# Altium PCB McuComBrd.PcbDoc
Units mil, origin at the board's own origin, x right, y up, seen from the top; angles counter-clockwise.
Board outline 1900 x 1900 mil, 4 copper layers (Top Layer, GND, PWR, Bottom Layer), stack 23.756 mil thick; 59 components, 55 nets, 228 pads, 55 vias.
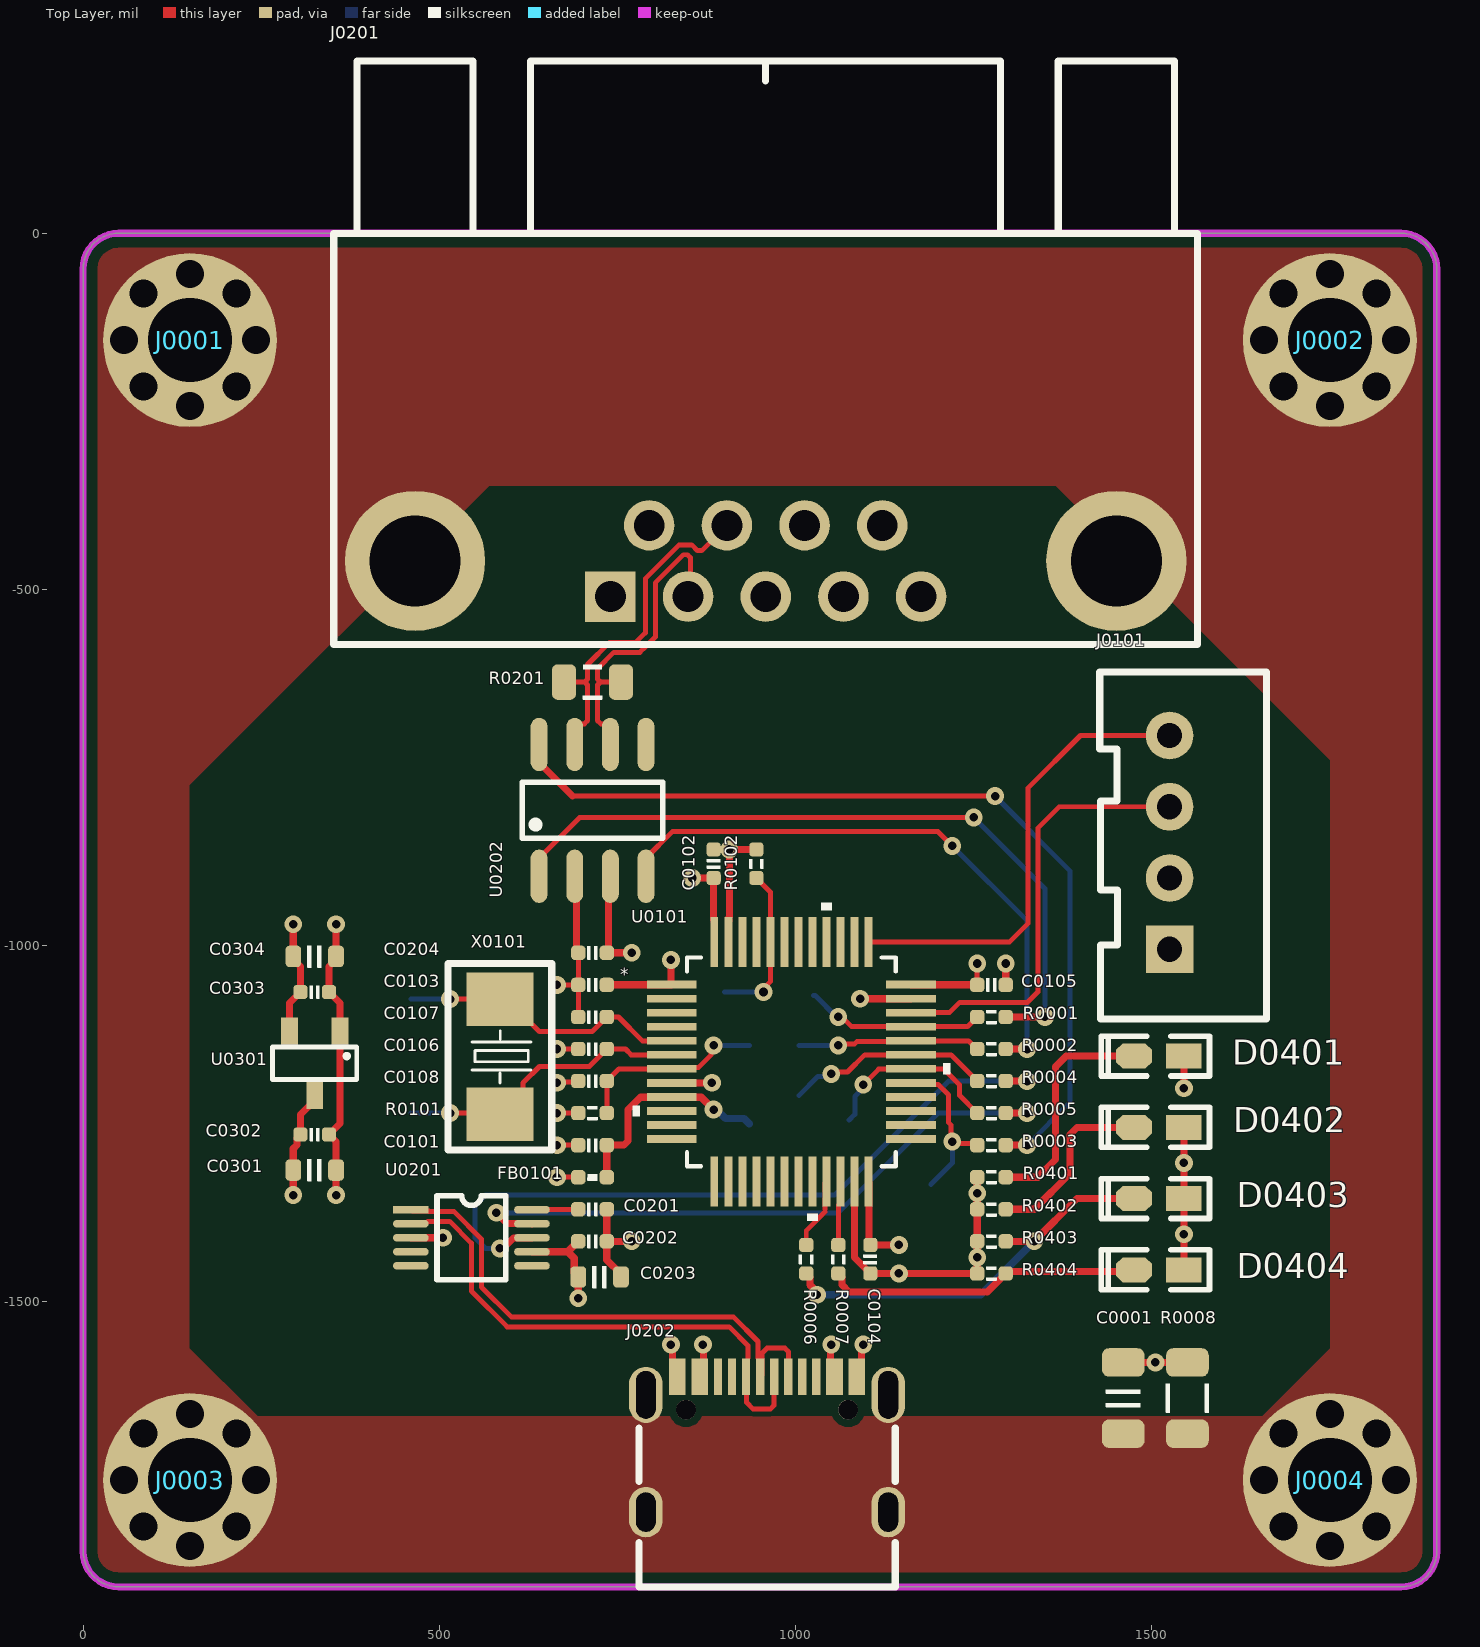
[diagram p0: Top Layer view]
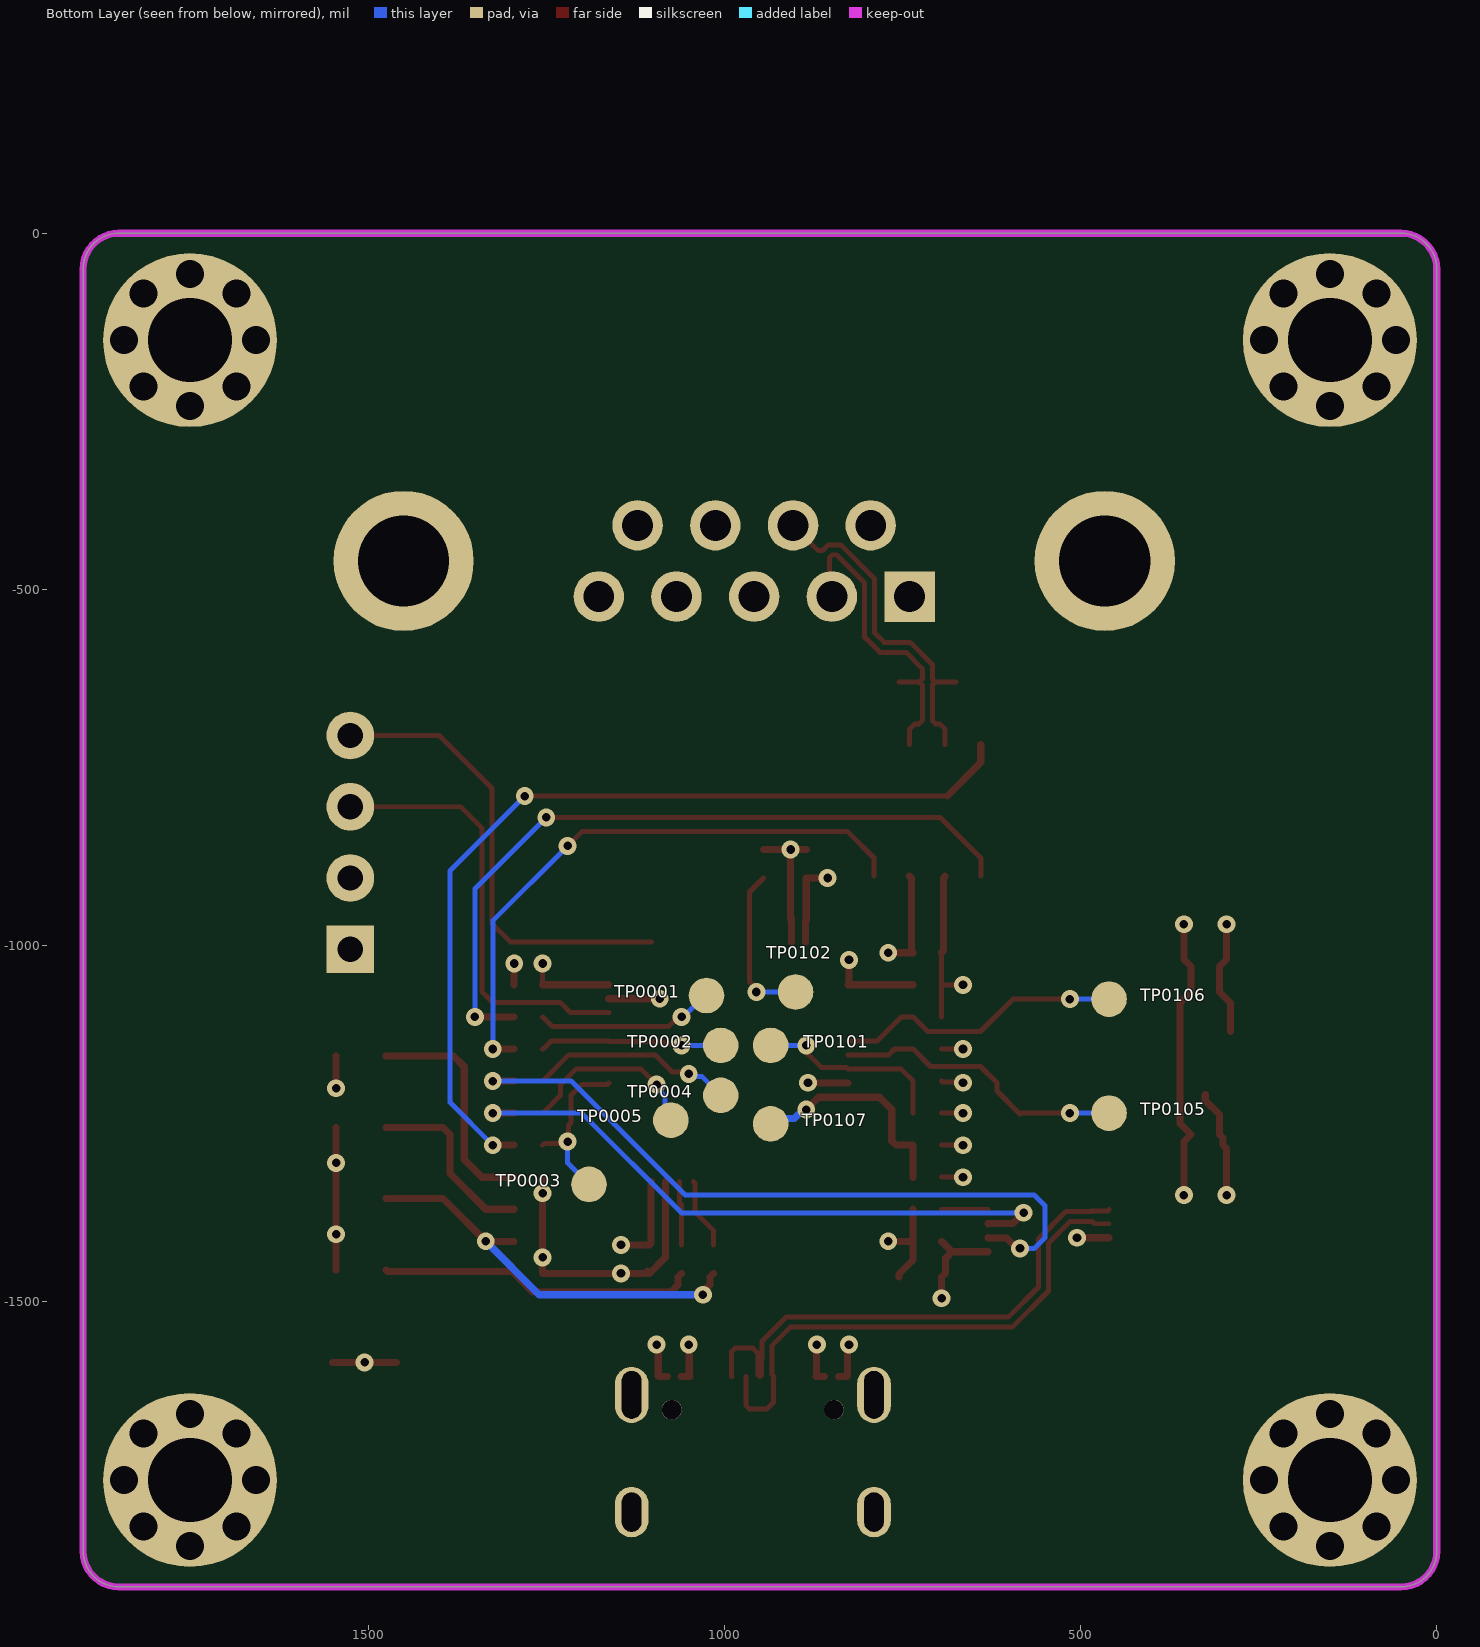
[diagram p1: Bottom Layer view, seen from below]
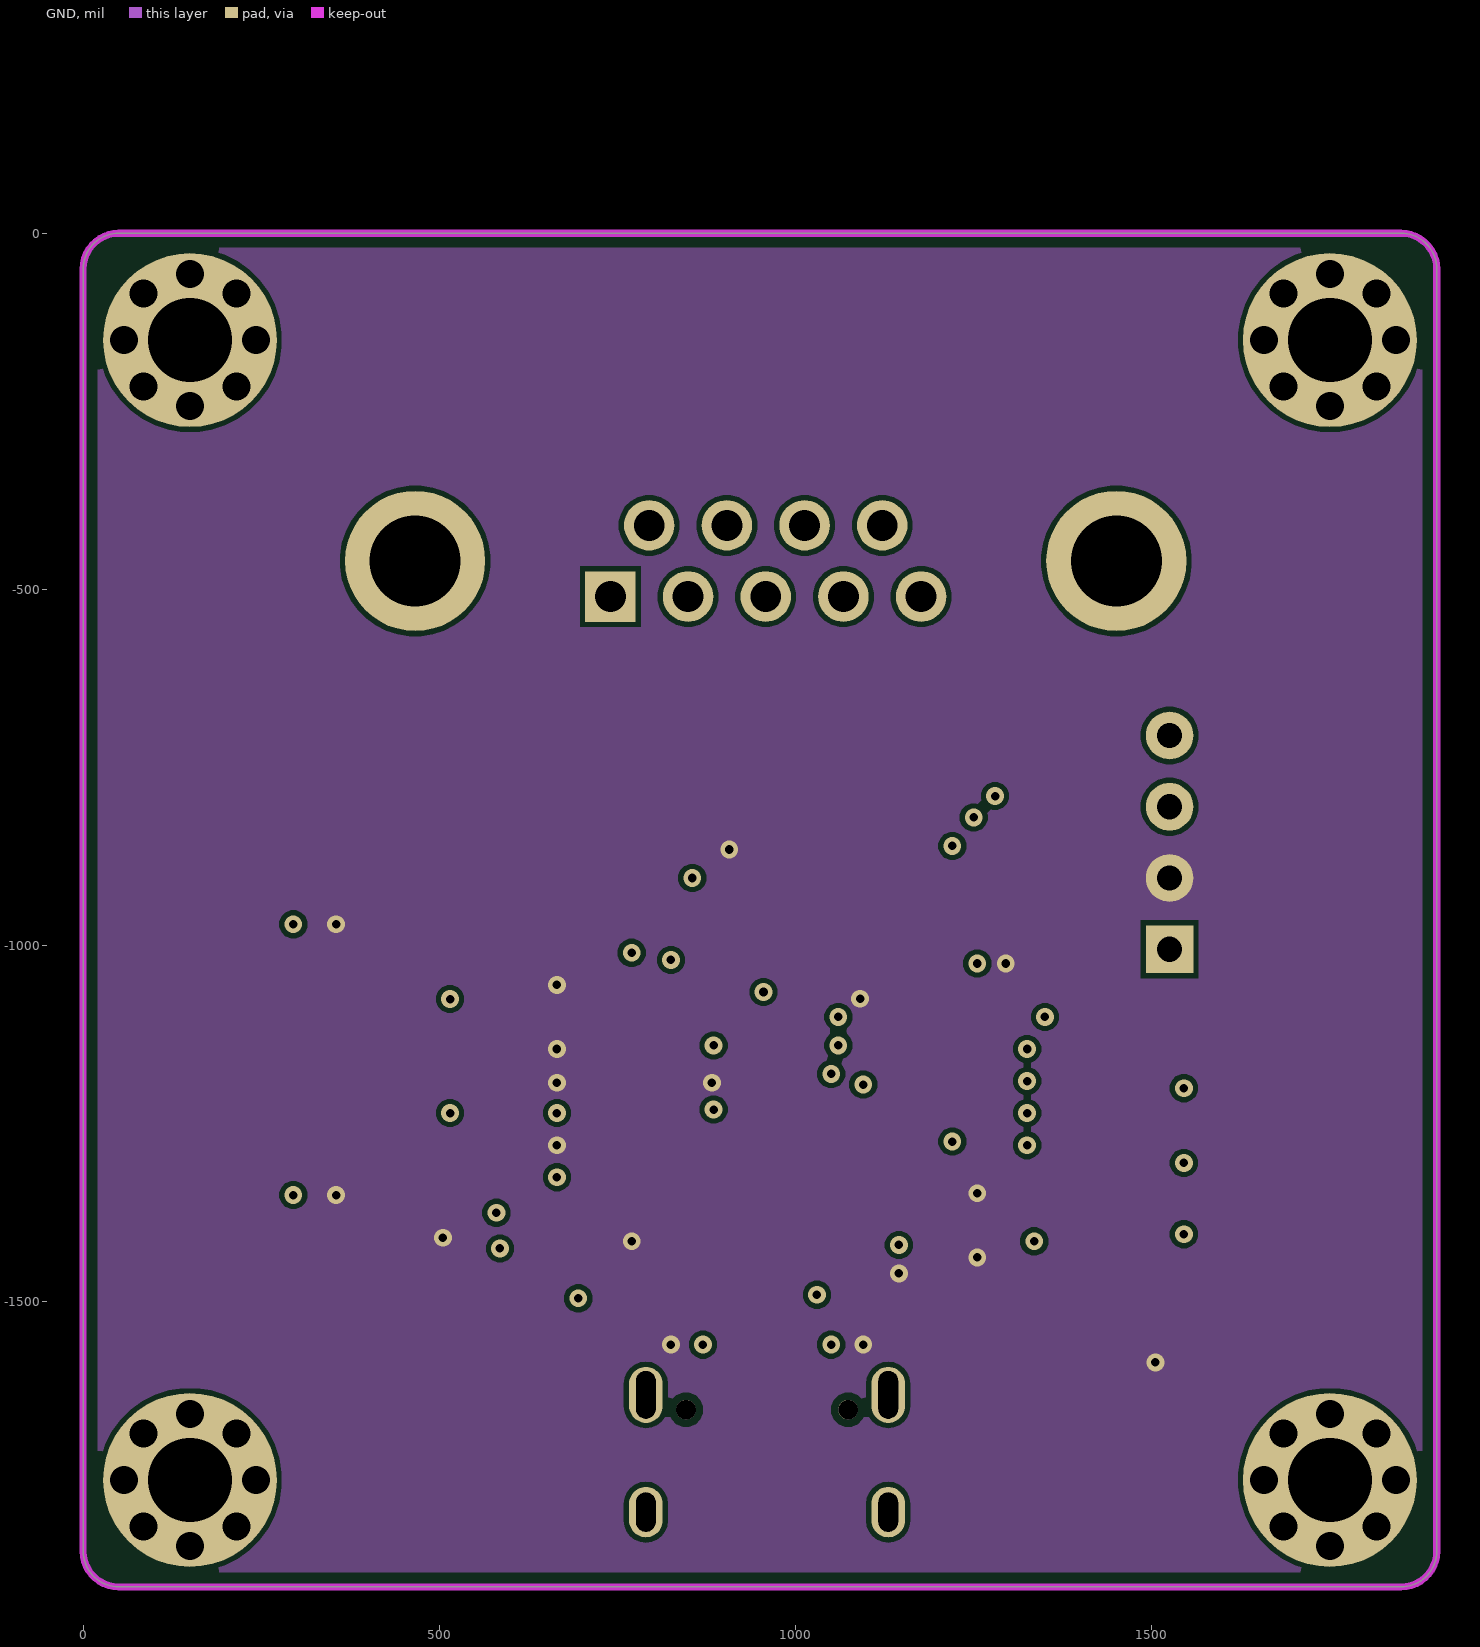
[diagram p2: GND]
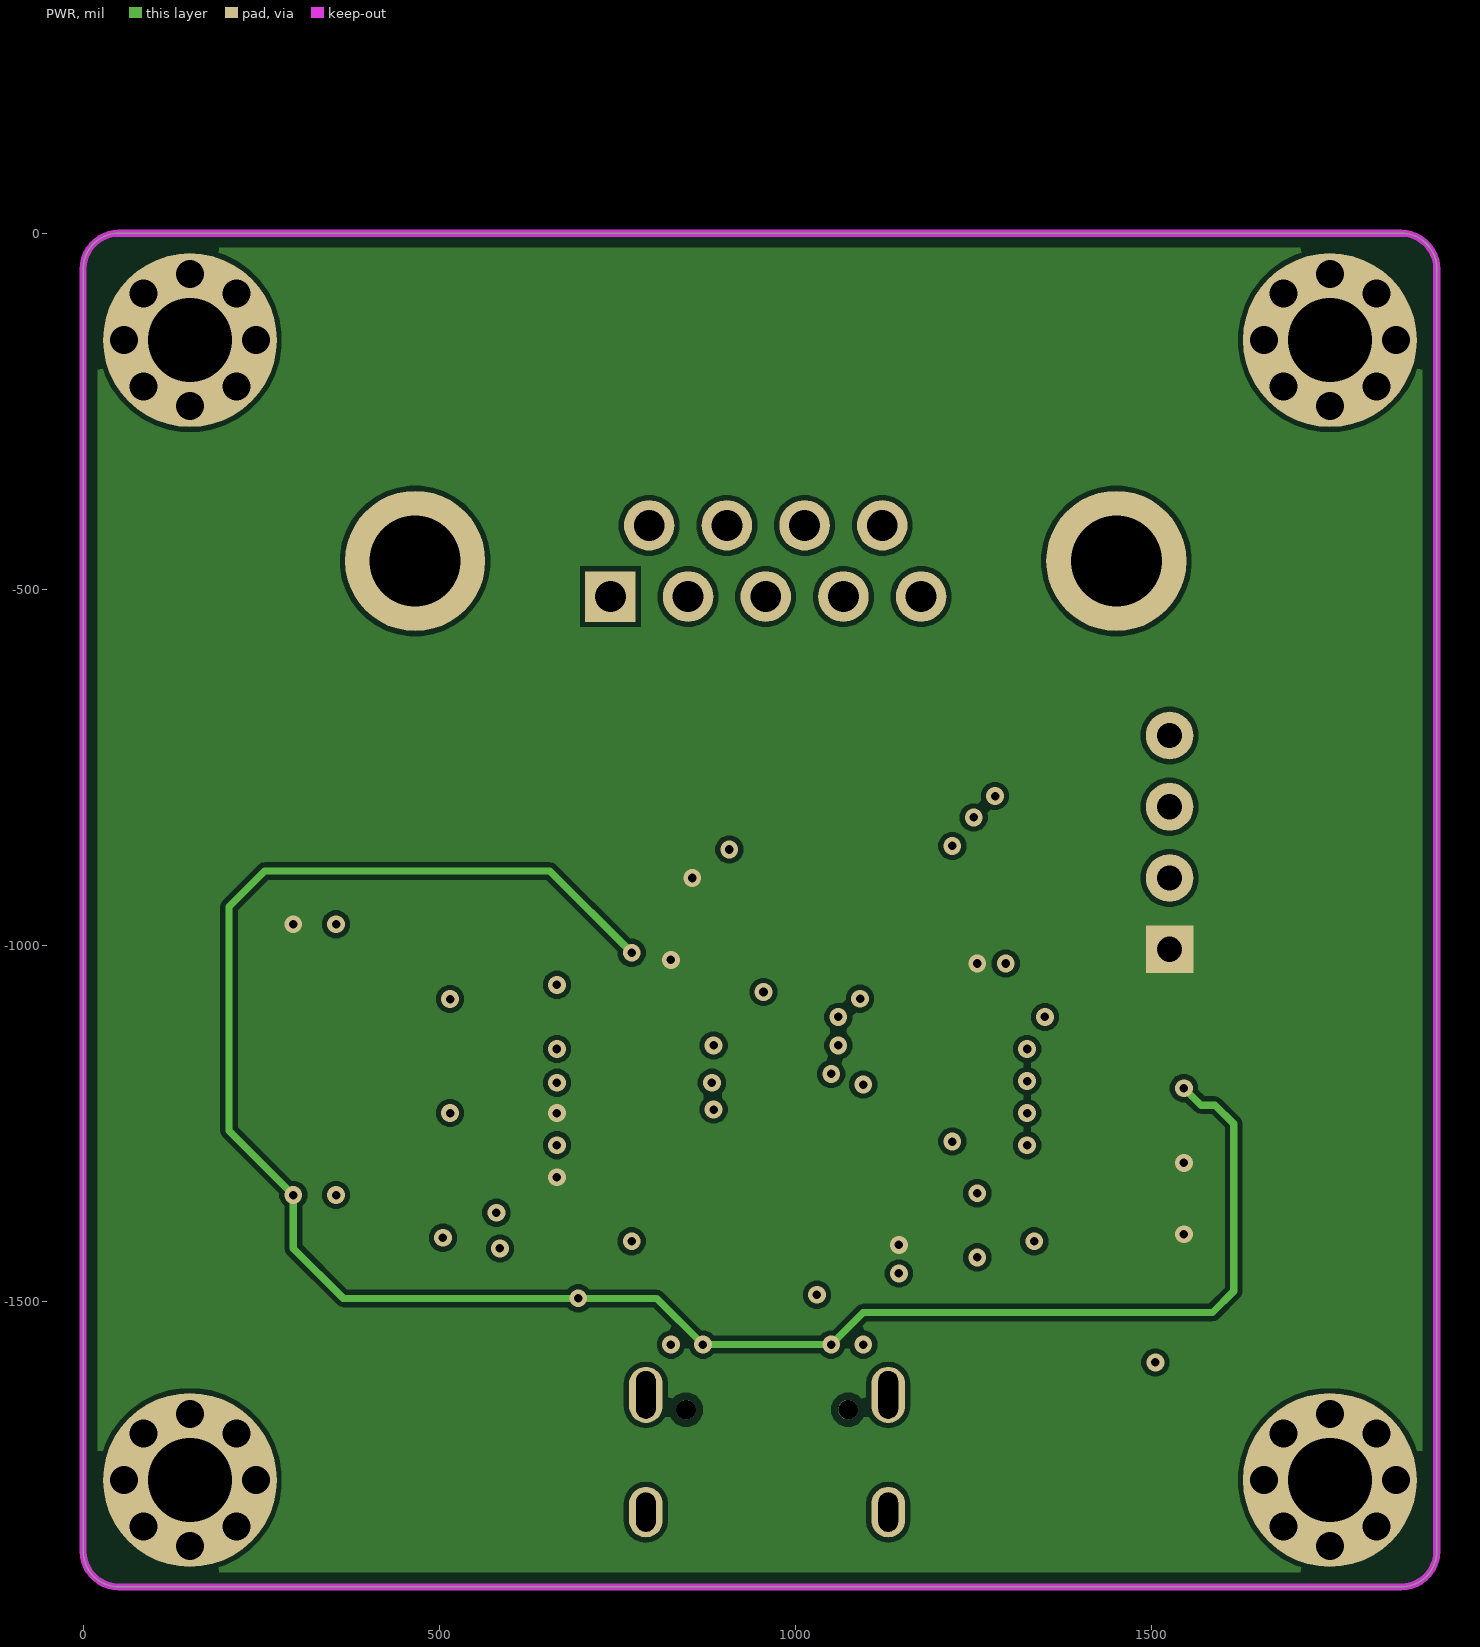
[diagram p3: PWR]
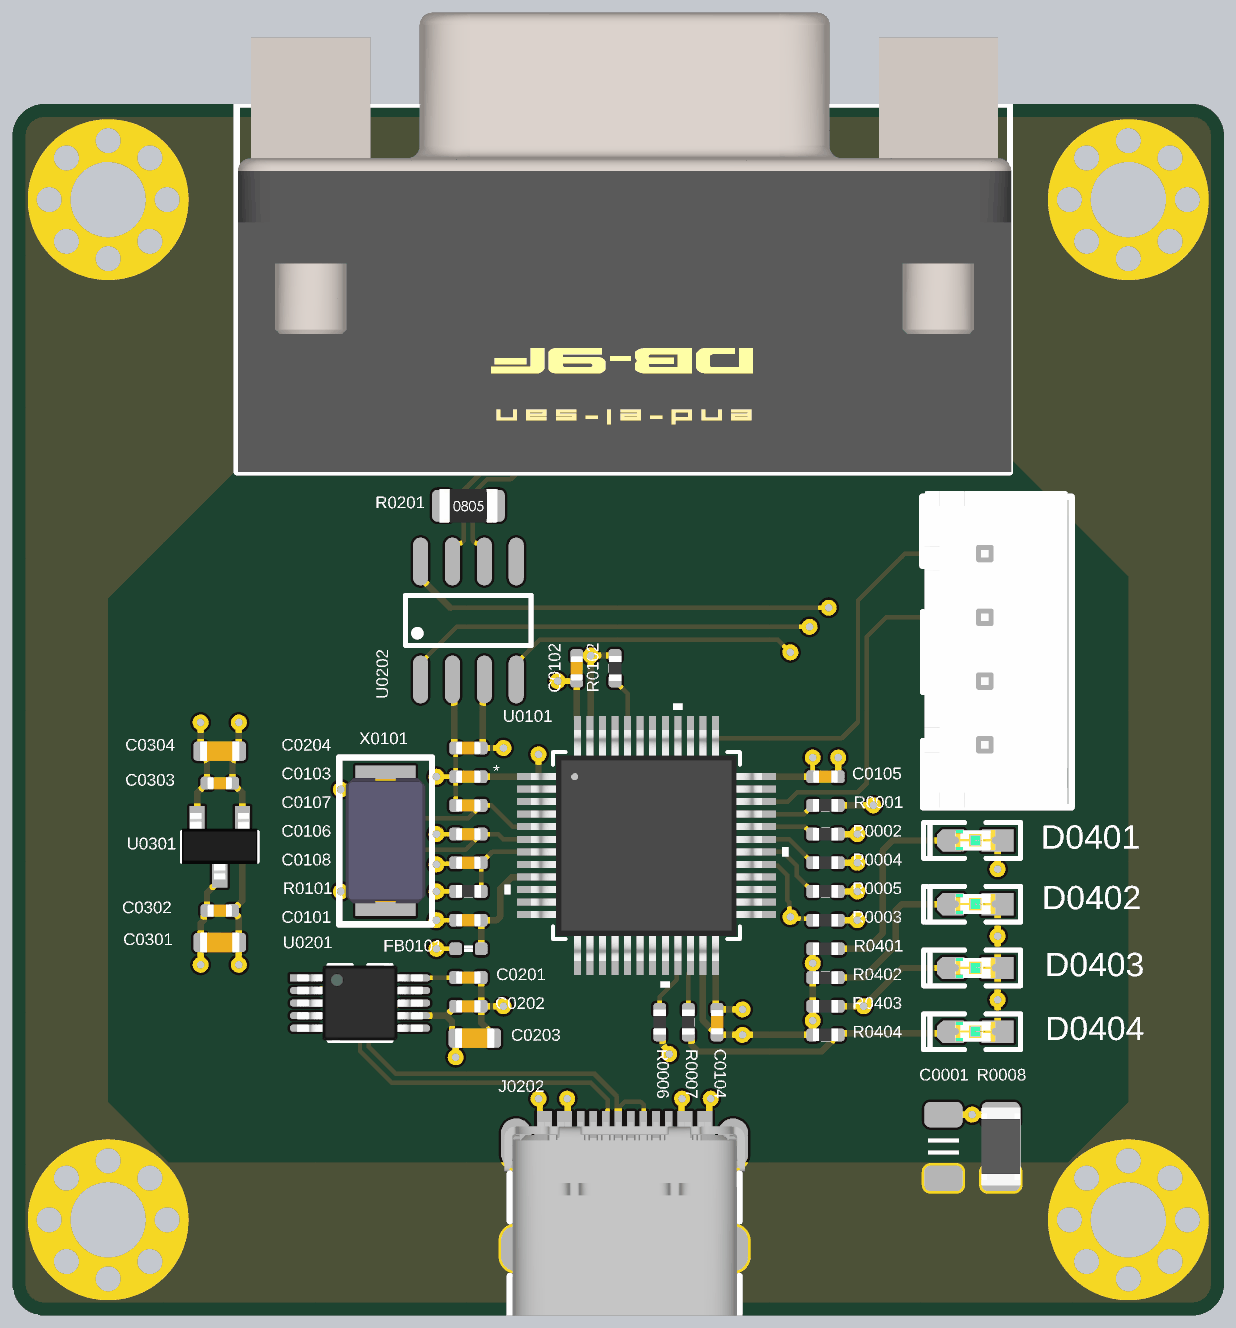
[diagram p4: 3D render of the assembled board from above, using the file's embedded part models]

## Layer stack, top to bottom
Top Solder: solder mask 0.4, Solder Resist, Dk 3.5
Top Layer: signal copper 1.4
Dielectric 2: prepreg 2.8, PP-006, Dk 4.1
GND: signal copper 1.378
Dielectric 1: dielectric 12.6, FR-4, Dk 4.8
PWR: signal copper 1.378
Dielectric 3: prepreg 2.8, PP-006, Dk 4.1
Bottom Layer: signal copper 1.4
Bottom Solder: solder mask 0.4, Solder Resist, Dk 3.5

## Board outline
0,-1850 ccw(c50,-1850) 50,-1900 1850,-1900 ccw(c1850,-1850) 1900,-1850 1900,-50 ccw(c1850,-50) 1850,0 50,0 ccw(c50,-50) 0,-50

## Design rules (kind name [scope] priority, off if disabled: settings)
Clearance [OnLayer('Keep-Out Layer')] p1: gap=15 ignorepadtopadclearanceinfootprint=FALSE
Clearance Clearance_1 [All] p2: gap=7 ignorepadtopadclearanceinfootprint=FALSE except(10: Arc-Hole Track-Hole Fill-Hole Poly-Hole Region-Hole)
DiffPairsRouting [All] p1: maxlimit=10 minlimit=7 mostfreqgap=7 toplayer_minwidth=7 toplayer_maxwidth=15 toplayer_prefwidth=7 midlayer1_minwidth=7 midlayer1_maxwidth=15 midlayer1_prefwidth=7 midlayer2_minwidth=7 midlayer2_maxwidth=15 midlayer2_prefwidth=7 bottomlayer_minwidth=7 bottomlayer_maxwidth=15 bottomlayer_prefwidth=7 maxuncoupledlength=500
PlaneConnect [All] p1: planeconnectstyle=Direct reliefexpansion=20 reliefentries=4 reliefconductorwidth=10 reliefairgap=10
PolygonConnect [All] p1: connectstyle=Direct reliefconductorwidth=10 reliefentries=4 polygonreliefangle="90 Angle" airgapwidth=10
RoutingVias [All] p1: holewidth=12 width=25 viastyle="Through Hole" minholewidth=12 minwidth=20 maxholewidth=28 maxwidth=50
SolderMaskExpansion [All] p1: expansion=4 istentingtop=FALSE
SupplyNets "Schematic Supply Nets_3" [InNet('EARTH')] p1: voltage=0.000
SupplyNets "Schematic Supply Nets_2" [InNet('3V3')] p2: voltage=0.000
SupplyNets "Schematic Supply Nets_1" [InNet('5V')] p3: voltage=0.000
SupplyNets "Schematic Supply Nets" [InNet('GND')] p4: voltage=0.000
Width [All] p1: maxlimit=10 minlimit=7 preferedwidth=7 minimp=50.000000 maximp=50.000000 favimp=50.000000
28 further rules are at their usual default settings.

## Classes and differential pairs
component class LED: D0401 D0402 D0403 D0404 R0401 R0402 R0403 R0404
component class PWR: C0301 C0302 C0303 C0304 U0301
component class MCU: C0101 C0102 C0103 C0104 C0105 C0106 C0107 C0108 FB0101 J0101 R0101 R0102 TP0101 TP0102 TP0105 TP0106 TP0107 U0101 X0101
component class COM: C0201 C0202 C0203 C0204 J0201 J0202 R0201 U0201 U0202
component class 00_McuComBrd: C0001 J0001 J0002 J0003 J0004 R0001 R0002 R0003 R0004 R0005 R0006 R0007 R0008 TP0001 TP0002 TP0003 TP0004 TP0005
differential pair USB_D: +USB_D_P -USB_D_N
differential pair CAN: +CAN_P -CAN_N

## Components (designator, comment, footprint, x,y, rotation, side; value= is the part's Value field where it differs from the comment)
C0001 "Cap" C1206 1460,-1635 r270 top
C0101 "Cap" C0402 715,-1280 r0 top
C0102 "Cap" C0402 885,-885 r270 top
C0103 "Cap" C0402 715,-1055 r0 top
C0104 "Cap" C0402 1105,-1440 r90 top
C0105 "Cap" C0402 1275,-1055 r180 top
C0106 "Cap" C0402 715,-1145 r0 top
C0107 "Cap" C0402 715,-1100 r0 top
C0108 "Cap" C0402 715,-1190 r0 top
C0201 "Cap" C0402 715,-1370 r180 top
C0202 "Cap" C0402 715,-1415 r180 top
C0203 "Cap" C0603 725,-1465 r180 top
C0204 "Cap" C0402 715,-1010 r0 top
C0301 "Cap" C0603 325,-1315 r180 top
C0302 "Cap" C0402 325,-1265 r180 top
C0303 "Cap" C0402 325,-1065 r180 top
C0304 "Cap" C0603 325,-1015 r180 top
D0401 "黄色" "LED 0603Y" 1510,-1155 r180 top
D0402 "黄色" "LED 0603Y" 1510,-1255 r180 top
D0403 "黄色" "LED 0603Y" 1510,-1355 r180 top
D0404 "黄色" "LED 0603Y" 1510,-1455 r180 top
FB0101 "FB" "FB 0402" 715,-1325 r180 top
J0001 "HOLE" "定位孔 Φ3 1" 150,-150 r0 top
J0002 "HOLE" "定位孔 Φ3 1" 1750,-150 r0 top
J0003 "HOLE" "定位孔 Φ3 1" 150,-1750 r0 top
J0004 "HOLE" "定位孔 Φ3 1" 1750,-1750 r0 top
J0101 "HDR-1X4" XH2.54-4P 1525,-1005 r90 top
J0201 "DB9P" DB9P 740,-510 r180 top
J0202 "TYPE-C-16P" USB-C_16P 960,-1700 r0 top
R0001 "RES" R0402 1275,-1100 r0 top
R0002 "RES" R0402 1275,-1145 r0 top
R0003 "RES" R0402 1275,-1280 r0 top
R0004 "RES" R0402 1275,-1190 r0 top
R0005 "RES" R0402 1275,-1235 r0 top
R0006 "RES" R0402 1015,-1440 r270 top
R0007 "RES" R0402 1060,-1440 r270 top
R0008 "RES" R1206 1550,-1635 r270 top
R0101 "RES" R0402 715,-1235 r0 top
R0102 "RES" R0402 945,-885 r270 top
R0201 "RES" R0805 715,-630 r0 top
R0401 "RES" R0402 1275,-1325 r0 top
R0402 "RES" R0402 1275,-1370 r0 top
R0403 "RES" R0402 1275,-1415 r0 top
R0404 "RES" R0402 1275,-1460 r0 top
TP0001 "Test Point" "Test Point" 1025,-1070 r90 bottom
TP0002 "Test Point" "Test Point" 1005,-1140 r90 bottom
TP0003 "Test Point" "Test Point" 1190,-1335 r90 bottom
TP0004 "Test Point" "Test Point" 1005,-1210 r90 bottom
TP0005 "Test Point" "Test Point" 1075,-1245 r90 bottom
TP0101 "Test Point" "Test Point" 935,-1140 r90 bottom
TP0102 "Test Point" "Test Point" 900,-1065 r90 bottom
TP0105 "Test Point" "Test Point" 460,-1235 r90 bottom
TP0106 "Test Point" "Test Point" 460,-1075 r90 bottom
TP0107 "Test Point" "Test Point" 935,-1250 r90 bottom
U0101 "STM32F103C8T6" LQFP48_STM-M 994.21,-1163 r0 top
U0201 "CH340E" MSOP10 545,-1410 r0 top
U0202 "TJA1050" "SOIC8_L W=3.9mm" 715,-810 r90 top
U0301 "XC6206P332" SOT23-3L 325,-1165 r180 top
X0101 "8MHz" "XTAL-2P 5032" 585,-1236.42 r90 top

## Footprints (in the part's own frame and the unit in brackets; to place one, negate y for a bottom-side part, rotate by r counter-clockwise, add the part's x,y. Pads: shape width x height; smd on the part's side, far side on the other; paste and mask are expansions set on the pad)
C0402 [mil]
  rrect50% 20x20 smd: 1(-20,0) 2(20,0)
  silkscreen extent -6,-9 6,9, body extent -20,-10 20,10, height 20
C0603 [mil]
  rrect50% 22x30 smd: 1(-30,0) 2(30,0)
  silkscreen extent -10,-15 10,15, body extent -31,-16 32,16, height 31
C1206 [mil]
  rrect50% 40x60 smd: 1(-50,0) 2(50,0)
  silkscreen extent -12,-24 12,24, body extent -59,-30 59,30, height 59
DB9P [mm]
  rect 1.8x1.8 hole 1.1: 1(0,0)
  round 1.8 hole 1.1: 2(-2.77,0) 3(-5.54,0) 4(-8.31,0) 5(-11.08,0) 6(-1.385,-2.54) 7(-4.155,-2.54) 8(-6.925,-2.54) 9(-9.695,-2.54)
  round 5 hole 3.25: 10(-18.04,-1.27) 11(6.96,-1.27)
  silkscreen extent -20.94,-19.09 9.86,1.71, body extent -20.99,-16.6 9.82,1.71, height 12.6
"FB 0402" [mil] "贴片磁珠"
  rrect50% 20x20 smd: 1(-20,0) 2(20,0)
  silkscreen extent -7,-5 7,5, body extent -20,-10 20,10, height 19
"LED 0603Y" [mil] "黄色0603LED"
  rect 50x35 smd: A(-35,0)
  oct 50x35 smd: K(35,0)
  silkscreen extent -71,-28 81,28, body extent -32,-16 31,16, height 24
LQFP48_STM-M [mil]
  rect 70x11 smd paste+0 mask+0: 1(-168,108.27) 2(-168,88.58) 3(-168,68.9) 4(-168,49.21) 5(-168,29.53) 6(-168,9.84) 7(-168,-9.84) 8(-168,-29.53) 9(-168,-49.21) 10(-168,-68.9) 11(-168,-88.58) 12(-168,-108.27) 25(168,-108.27) 26(168,-88.58) 27(168,-68.9) 28(168,-49.21) 29(168,-29.53) 30(168,-9.84) 31(168,9.84) 32(168,29.53) 33(168,49.21) 34(168,68.9) 35(168,88.58) 36(168,108.27)
  rect 11x70 smd paste+0 mask+0: 13(-108.27,-168) 14(-88.58,-168) 15(-68.9,-168) 16(-49.21,-168) 17(-29.53,-168) 18(-9.84,-168) 19(9.84,-168) 20(29.53,-168) 21(49.21,-168) 22(68.9,-168) 23(88.58,-168) 24(108.27,-168) 37(108.27,168) 38(88.58,168) 39(68.9,168) 40(49.21,168) 41(29.53,168) 42(9.84,168) 43(-9.84,168) 44(-29.53,168) 45(-49.21,168) 46(-68.9,168) 47(-88.58,168) 48(-108.27,168)
  silkscreen extent -223,-223 223,223, body extent -181,-181 181,181, height 63
MSOP10 [mil]
  rect 50x11 smd: 1(-85,39.37)
  oval 50x11 smd: 2(-85,19.69) 3(-85,0) 4(-85,-19.69) 5(-85,-39.37) 6(85,-39.37) 7(85,-19.68) 8(85,0) 9(85,19.69) 10(85,39.37)
  silkscreen extent -48,-59 48,59, body extent -99,-59 99,59, height 41
R0402 [mil]
  rrect50% 20x20 smd: 1(-20,0) 2(20,0)
  silkscreen extent -6,-10 6,10, body extent -20,-10 20,10, height 14
R0805 [mil]
  rrect50% 34x50 smd: 1(-40,0) 2(40,0)
  silkscreen extent -13,-24 13,24, body extent -45,-27 45,27, height 30
R1206 [mil]
  rrect50% 40x60 smd: 1(-50,0) 2(50,0)
  silkscreen extent -20,-30 20,30, body extent -61,-31 61,31, height 19
"SOIC8_L W=3.9mm" [mm] "SOIC, 8-Leads, Body 4.9x3.9mm, Pitch 1.27mm, IPC High Density"
  oval 1.9x0.6 smd: 1(-2.35,1.905) 2(-2.35,0.635) 3(-2.35,-0.635) 4(-2.35,-1.905) 5(2.35,-1.905) 6(2.35,-0.635) 7(2.35,0.635) 8(2.35,1.905)
  silkscreen extent -1,-2.5 1,2.5, body extent -3,-2.45 3,2.45, height 1.75
SOT23-3L [mm] "SOT23, 3-Leads, Body 2.9x1.3mm, Pitch 0.95mm, Lead Span 2.3mm - Reverse Pinning, IPC High Density"
  rect 0.6x1 smd: 1(-0.9,-1.125) 2(0.9,-1.125) 3(0,1.125)
  silkscreen extent -1.5,-0.58 1.5,0.58, body extent -1.5,-1.35 1.5,1.29, height 1.08
"Test Point" [mil]
  round 50 smd: 1(0,0)
USB-C_16P [mm]
  oval 1.2x2 hole 0.7 slot 1.7 at 90 deg: 1(-4.32,1.765) 2(4.32,1.765)
  oval 1.2x1.8 hole 0.7 slot 1.4 at 90 deg: 3(-4.32,-2.415) 4(4.32,-2.415)
  rect 0.3x1.3 smd: A1(-3.35,2.415) A4(-2.55,2.415) A5(-1.25,2.415) A6(-0.25,2.415) A7(0.25,2.415) A8(1.25,2.415) A9(2.55,2.415) A12(3.35,2.415) B1(3.05,2.415) B4(2.25,2.415) B5(1.75,2.415) B6(0.75,2.415) B7(-0.75,2.415) B8(-1.75,2.415) B9(-2.25,2.415) B12(-3.05,2.415)
  round 0.7 hole 0.7 unplated: ""(-2.89,1.235) ""(2.89,1.235)
  silkscreen extent -4.57,-5.08 4.57,0.57, body extent -4.79,-5.08 4.79,2.63, height 3.25
XH2.54-4P [mm] "接插件，4P"
  rect 1.7x1.7 hole 0.9: 1(0,0)
  round 1.7 hole 0.9: 2(2.54,0) 3(5.08,0) 4(7.62,0)
  silkscreen extent -2.49,-3.45 9.88,2.49, body extent -2.5,-3.3 10.12,2.4, height 7.03
"XTAL-2P 5032" [mm]
  rect 1.9x2.4 smd: 1(0,0) 2(4.1,0)
  silkscreen extent -1.27,-1.85 5.38,1.85, body extent -0.44,-1.6 4.56,1.6, height 1.3
"定位孔 Φ3 1" [mm]
  round 1 hole 1: 1(-2.35,0) 1(-1.662,-1.662) 1(-1.662,1.662) 1(0,-2.35) 1(0,2.35) 1(1.662,-1.662) 1(1.662,1.662) 1(2.35,0)
  round 6.2 hole 3: 1(0,0)

## Part data
C0001: "电容", Volt=2000V, Cap=1nF, Size=1206
C0101 C0102 C0103 C0104 C0105 C0106 C0107 C0108 C0201 C0202 C0204 C0301 C0302 C0303 C0304: Volt=50V
  C0101 C0102 C0103 C0104 C0105 C0108 C0201 C0202 C0204 C0302 C0303: Cap=100nF, Size=0402
  C0106 C0107: Cap=22pF, Size=0402
  C0301 C0304: Cap=1uF, Size=0603
C0203: Volt=25V, Cap=10uF, Size=0603
D0401 D0402 D0403 D0404: library part LED-SMD, "贴片LED", BOM名称=贴片LED, 学习资源=www.ooocke.com, 版权归属=源创客
FB0101: "磁珠", Current=1A, Freq=100MHz, Res=600Ω, Size=0402
J0101: library part "Header 4P", "4P接插件", BOM名称=4P接插件, 学习资源=www.ooocke.com, 版权归属=源创客
J0201: Current Rating (Max)=5A, JLCPCB Part Class="Extended Part", LCSC Part Name="D-Sub P数:9P", Manufacturer=Amphenol, Manufacturer Part=ID09S33E4GV00LF, Operating Temperature Range=-55℃~+125℃, Add into BOM=yes, Connector Type=D-Sub, Contact Plating=金, Convert to PCB=yes, Datasheet=https://atta.szlcsc.com/upload/public/pdf/source/20180524/C185657_A3EAFC28C6ED417B8B89632C5DE17622.pdf, Device=ID09S33E4GV00LF, Gender=-, Mounting Style=弯插, Number of Pins=9P, Number of Rows=2, Supplier=LCSC, Supplier Footprint=弯插, Supplier Part=C185657, Symbol=ID09S33E4GV00LF
J0202: library part USB-C-16P, BOM_JLCPCB Part Class="Extended Part", BOM_Manufacturer="Shenzhen Kinghelm Elec", BOM_Manufacturer Part=KH-TYPE-C-16P, BOM_Supplier=LCSC, BOM_Supplier Part=C709357, Contributor=LCSC, spicePre=U, spiceSymbolName=KH-TYPE-C-16P
R0001 R0002 R0003 R0004 R0005 R0006 R0007 R0008 R0101 R0102 R0201 R0401 R0402 R0403 R0404: "电阻", Current=1A
  R0001 R0002 R0003 R0004 R0005: Res=100Ω, Size=0402
  R0006 R0007: Res=10Ω, Size=0402
  R0008: Res=3.3MΩ, Size=1206
  R0101 R0102: Res=10kΩ, Size=0402
  R0201: Res=120Ω, Size=0805
  R0401 R0402 R0403 R0404: Res=1kΩ, Size=0603
U0101: "No Description Available", Mfr_Name=STMicroelectronics, RefDes=RefDes, Type=Type
U0201: "USB to TTL Serial / UART"
U0301: library part XC6206, "VIN < 6V"
X0101: library part XTAL-2, "2脚晶振", BOM名称=2脚晶振, 学习资源=www.ooocke.com, 版权归属=源创客

## Via types
v1: diameter 25, hole 12, Top Layer to Bottom Layer, 55 vias

## Nets (pads, with @x,y where several pads share a name; then routed paths per layer and width w, separated by ;. In a path a pad name is that pad's centre, name@x,y a point inside that pad or via, vN(x,y) a via of type N, cw(c..) or ccw(c..) an arc to the next point about the centre after c; other vN are vias at no path point)
3V3: C0102.2 C0103.2 C0104.2 C0105.2 C0303.2 C0304.2 D0402.A D0403.A D0404.A FB0101.2 J0101.1 R0101.1 U0101.1 U0101.24 U0101.36 U0101.48 U0301.2 | length 921.6
  Top Layer w7: v1(665,-1325) FB0101.2 ; v1(665,-1235) R0101.1 ; U0101.36 U0101.36@1162.35,-1054.87 ; C0105.2@1254.87,-1054.87 C0105.2 v1(1255,-1025)
  Top Layer w10: U0301.2 289.57,-1080.43 C0303.2 305,-1029.27 295,-1019.27 C0304.2 v1(295,-970) ; C0103.2 735.13,-1054.87 826.08,-1054.87 U0101.1 825.5,-1054.73 825,-1054.23 v1(825,-1020) ; v1(855,-905) C0102.2 885,-964.56 885.94,-965.5 U0101.48 ; U0101.24 1102.98,-1331.5 1102.98,-1417.98 C0104.2 v1(1145,-1420) ; U0101.36@1162.35,-1054.87 C0105.2@1254.87,-1054.87 ; D0404.A D0403.A D0402.A
  other v1: 1545,-1405 1545,-1305
5V: C0202.2 C0203.2 C0204.2 C0301.2 C0302.2 D0401.A J0202.A4 J0202.A9 J0202.B4 J0202.B9 U0201.7 U0202.3 U0301.3 | length 3483.1
  Top Layer w10: v1(295,-1350) C0301.2 295,-1285 300,-1280 300,-1270 C0302.2 305,-1237.17 325,-1217.17 U0301.3 ; U0201.7 680.31,-1429.68 ; v1(695,-1495) C0203.2 689.31,-1459.31 689.31,-1438.68 680.31,-1429.68 ; C0202.2 680.31,-1429.68 ; U0202.3 737.5,-905.02 737.5,-1007.5 C0204.2 v1(770,-1010) ; J0202.A4 J0202.B9 870.71,-1604.2 870.71,-1560.71 v1(870,-1560) ; v1(1050,-1560) 1049.29,-1560.71 1049.29,-1604.2 J0202.B4 J0202.A9 ; v1(1545,-1200) D0401.A
  PWR w10: v1(770,-1010) 655,-895 255,-895 205,-945 205,-1260 v1(295,-1350) 295,-1425 365,-1495 v1(695,-1495) 805,-1495 v1(870,-1560) v1(1050,-1560) 1095,-1515 1585,-1515 1615,-1485 1615,-1250 1588.94,-1223.93 1568.94,-1223.93 v1(1545,-1200)
BOOT0: R0102.2 TP0102.1 U0101.44 | length 227.2
  Top Layer w7: R0102.2 964.69,-924.68 U0101.44 964.69,-1050.44 955,-1060.13 v1(955,-1065)
  Bottom Layer w7: TP0102.1 v1(955,-1065)
CAN_MOD: R0003.1 TP0003.1 U0101.29 | length 236.8
  Top Layer w7: U0101.29 1164.21,-1194.53 1199.88,-1194.53 1215,-1209.65 1215,-1248.5 1218.5,-1252 1218.5,-1273.5 v1(1220,-1275) 1222.5,-1277.5 1252.5,-1277.5 R0003.1
  Bottom Layer w7: TP0003.1 1220,-1305 v1(1220,-1275)
CAN_N: J0201.2 R0201.2 U0202.6 | length 448.3
  Top Layer w7: U0202.6 740,-696.39 732.32,-688.71 726.57,-688.71 722,-684.14 722,-634.1 726.1,-630 ; R0201.2 726.1,-630 ; J0201.2 852.39,-506.67 852.39,-455.39 848.29,-451.29 842.49,-451.29 803.13,-490.65 803.13,-566.67 794.93,-574.87 789.69,-580.1 781.49,-588.31 744.82,-588.31 722,-611.13 722,-625.9 726.1,-630
CAN_P: J0201.7 R0201.1 U0202.7 | length 483.1
  Top Layer w7: R0201.1 703.9,-630 ; U0202.7 690,-696.39 697.68,-688.71 703.43,-688.71 708,-684.14 708,-634.1 703.9,-630 ; J0201.7 868.09,-445.49 862.29,-445.49 854.09,-437.29 836.69,-437.29 789.13,-484.86 789.13,-560.87 775.69,-574.31 739.03,-574.31 708,-605.33 708,-625.9 703.9,-630
CAN_RX: R0002.1 TP0002.1 U0101.32 | length 257.5
  Top Layer w7: v1(1060,-1140) 1062.26,-1137.74 1083,-1137.74 1086.5,-1134.24 1161.45,-1134.24 U0101.32 1242.66,-1133.47 1254.19,-1145 R0002.1
  Bottom Layer w7: TP0002.1 v1(1060,-1140)
CAN_TX: R0001.1 TP0001.1 U0101.33 | length 253.8
  Top Layer w7: v1(1060,-1100) 1064.87,-1100 1078.66,-1113.79 1241.21,-1113.79 R0001.1
  Bottom Layer w7: TP0001.1 1027.5,-1070 1057.5,-1100 v1(1060,-1100)
EARTH: C0001.2 J0001.1 J0002.1 J0003.1 J0004.1 J0201.10 J0201.11 J0202.1 J0202.2 J0202.3 J0202.4 R0008.2
GND: C0001.1 C0101.1 C0102.1 C0103.1 C0104.1 C0105.1 C0106.1 C0107.1 C0108.1 C0201.1 C0202.1 C0203.1 C0204.1 C0301.1 C0302.1 C0303.1 C0304.1 J0101.2 J0202.A1 J0202.A12 J0202.B1 J0202.B12 R0008.1 R0102.1 R0401.1 R0402.1 R0403.1 R0404.1 U0101.8 U0101.23 U0101.35 U0101.47 U0201.3 U0202.2 U0301.1 | length 1881.5
  Top Layer w7: v1(665,-1280) C0101.1 ; v1(665,-1192.5) 666.25,-1191.25 693.75,-1191.25 C0108.1 ; v1(665,-1145) C0106.1 ; v1(665,-1055) C0103.1 ; C0107.1 C0103.1 ; C0204.1 C0103.1
  Top Layer w10: v1(355,-1350) C0301.1 355,-1275 C0302.1 360.43,-1249.57 U0301.1 360.43,-1080.43 C0303.1 345,-1029.27 355,-1019.27 C0304.1 v1(355,-970) ; U0201.3 v1(505,-1410) ; U0202.2 692.5,-905.02 692.5,-1007.5 C0204.1 ; C0201.1 C0202.1 ; C0203.1 755,-1461 735,-1441 C0202.1 ; v1(770,-1415) C0202.1 ; v1(825,-1560) 827.2,-1562.2 827.2,-1604.01 J0202.A1 J0202.B12 ; U0101.8 v1(882.53,-1192.53) ; C0102.1 v1(907,-865) ; U0101.47 905.63,-965.5 906.13,-965 906.13,-961.07 907,-960.2 v1(907,-865) ; R0102.1 v1(907,-865) ; J0202.B1 J0202.A12 1092.8,-1604.01 1092.8,-1562.2 v1(1095,-1560) ; U0101.23 1082.8,-1437.8 C0104.1 ; v1(1090.58,-1074.42) U0101.35 ; C0104.1@1107.98,-1457.02 1107.98,-1457.98 1110,-1460 v1(1145,-1460) R0404.1 R0403.1 R0402.1 R0401.1 ; C0105.1 v1(1295,-1025) ; C0001.1 R0008.1
  other v1: 1505,-1585 1255,-1437.5 1255,-1347.5
GPIO1: R0006.1 U0101.21 | length 100.8
  Top Layer w7: R0006.1 1015,-1400 1041.43,-1373.57 1041.43,-1333 U0101.21
GPIO2: R0007.1 U0101.22 | length 90.3
  Top Layer w7: R0007.1 1060,-1363.61 1063.11,-1360.5 U0101.22
NetC0101_2: C0101.2 FB0101.1 TP0107.1 U0101.9 | length 314.6
  Top Layer w10: FB0101.1 C0101.2 759.14,-1280 765,-1274.14 765,-1230 782.29,-1212.71 825.71,-1212.71 U0101.9 826.71,-1212.71 867.71,-1212.71 v1(885,-1230)
  Bottom Layer w10: v1(885,-1230) 889.06,-1230 901.41,-1242.35 927.35,-1242.35 TP0107.1
NetC0201_2: C0201.2 U0201.10 | length 65.3
  Top Layer w7: U0201.10 630.32,-1370.31 694.69,-1370.31 C0201.2
NetD0401_K: D0401.K R0401.2 | length 326.6
  Top Layer w10: R0401.2 1340,-1325 1365,-1300 1365,-1170 1380,-1155 D0401.K
NetD0402_K: D0402.K R0402.2 | length 259.9
  Top Layer w10: R0402.2 1335,-1370 1385,-1320 1385,-1265 1395,-1255 D0402.K
NetD0403_K: D0403.K R0006.2 R0403.2 | length 577.1
  Top Layer w10: R0006.2 1020,-1465 1020,-1475.94 1030,-1485.94 v1(1030,-1490) ; R0403.2 v1(1335,-1415) 1395,-1355 D0403.K
  Bottom Layer w10: v1(1030,-1490) 1260,-1490 v1(1335,-1415)
NetD0404_K: D0404.K R0007.2 R0404.2 | length 445
  Top Layer w10: R0007.2 1065,-1465 1065,-1475.94 1075,-1485.94 1269.06,-1485.94 R0404.2 1297.5,-1457.5 1472.5,-1457.5 D0404.K
NetR0001_2: R0001.2 U0202.1 | length 1035.6
  Top Layer w7: U0202.1 640,-876.93 696.93,-820 v1(1250,-820)
  Top Layer w10: R0001.2 v1(1350,-1100)
  Bottom Layer w7: v1(1250,-820) 1350,-920 v1(1350,-1100)
NetR0002_2: R0002.2 U0202.4 | length 837.7
  Top Layer w7: U0202.4 790,-876.93 826.93,-840 1200,-840 v1(1220,-860)
  Top Layer w10: R0002.2 v1(1325,-1145)
  Bottom Layer w7: v1(1220,-860) 1325,-965 v1(1325,-1145)
NetR0003_2: R0003.2 U0202.8 | length 1273.4
  Top Layer w7: 686.93,-790 v1(1280,-790)
  Top Layer w10: U0202.8 640,-743.07 686.93,-790 ; R0003.2 v1(1325,-1280)
  Bottom Layer w7: v1(1280,-790) 1385,-895 1385,-1220 v1(1325,-1280)
NetR0004_2: R0004.2 U0201.8 | length 1014.9
  Top Layer w10: v1(585,-1425) 589.06,-1425 603.87,-1410.19 629.81,-1410.19 U0201.8 ; R0004.2 v1(1325,-1190)
  Bottom Layer w7: v1(585,-1425) 565,-1425 550,-1410 550,-1365 565,-1350 1055,-1350 1215,-1190 v1(1325,-1190)
NetR0005_2: R0005.2 U0201.9 | length 889.3
  Top Layer w10: v1(580,-1375) 595.12,-1390.12 629.81,-1390.12 U0201.9 ; R0005.2 v1(1325,-1235)
  Bottom Layer w7: v1(580,-1375) 1060,-1375 1200,-1235 v1(1325,-1235)
NetU0101_10: U0101.10
NetU0101_11: U0101.11
NetU0101_12: U0101.12
NetU0101_13: U0101.13
NetU0101_14: U0101.14
NetU0101_15: U0101.15
NetU0101_16: U0101.16
NetU0101_17: U0101.17
NetU0101_18: U0101.18
NetU0101_19: U0101.19
NetU0101_20: U0101.20
NetU0101_25: U0101.25
NetU0101_26: U0101.26
NetU0101_27: U0101.27
NetU0101_28: U0101.28
NetU0101_38: U0101.38
NetU0101_39: U0101.39
NetU0101_40: U0101.40
NetU0101_41: U0101.41
NetU0101_42: U0101.42
NetU0101_43: U0101.43
NetU0101_45: U0101.45
NetU0101_46: U0101.46
NRST: C0108.2 R0101.2 TP0101.1 U0101.7 | length 271.4
  Top Layer w7: R0101.2 C0108.2 752.16,-1172.84 U0101.7 828.21,-1170.84 863.88,-1170.84 881.56,-1153.16 881.56,-1143.44 v1(885,-1140)
  Bottom Layer w7: v1(885,-1140) TP0101.1
OSC_IN: C0107.2 TP0106.1 U0101.5 X0101.2 | length 407.4
  Top Layer w7: v1(515,-1075) X0101.2 594.84,-1075 640.34,-1120.5 714.5,-1120.5 C0107.2 751.53,-1100 785,-1133.47 U0101.5
  Bottom Layer w7: TP0106.1 v1(515,-1075)
OSC_OUT: C0106.2 TP0105.1 U0101.6 X0101.1 | length 414.1
  Top Layer w7: v1(515,-1235) X0101.1@585,-1235 ; X0101.1 617.38,-1204.04 617.38,-1192.62 640.5,-1169.5 710.5,-1169.5 C0106.2 761.18,-1145 769.34,-1153.16 U0101.6
  Bottom Layer w7: TP0105.1 v1(515,-1235)
SWCLK: J0101.4 U0101.37 | length 653.9
  Top Layer w7: U0101.37 1300,-995 1326,-969 1326,-779 1400,-705 J0101.4
SWDIO: J0101.3 U0101.34 | length 617.3
  Top Layer w7: U0101.34 1215.9,-1094.1 1230.5,-1079.5 1325.5,-1079.5 1340,-1065 1340,-835 1370,-805 J0101.3
USART1_RX: R0004.1 TP0004.1 U0101.31 | length 288.8
  Top Layer w7: v1(1050,-1180) 1052.56,-1177.43 1073,-1177.43 1097.28,-1153.16 U0101.31 1218.16,-1153.16 R0004.1
  Bottom Layer w7: TP0004.1 1031.56,-1183.44 1046.56,-1183.44 v1(1050,-1180)
USART1_TX: R0005.1 TP0005.1 U0101.30 | length 261.9
  Top Layer w7: v1(1095,-1195) 1116.71,-1173.29 1161.77,-1173.29 U0101.30 1207.71,-1172.84 1230,-1195.13 1230,-1210 R0005.1
  Bottom Layer w7: TP0005.1 1083.23,-1236.77 1083.23,-1211.64 1095,-1199.87 v1(1095,-1195)
USB_D_N: J0202.A7 J0202.B7 U0201.2 | length 752.2
  Top Layer w7: U0201.2 480.58,-1390.31 483.9,-1387 514.53,-1387 545,-1417.47 545,-1484.8 595.2,-1535 906.9,-1535 933.31,-1561.41 933.31,-1578.72 932.88,-1579.16 932.88,-1602.51 J0202.B7 931.01,-1605.45 931.01,-1641.01 940,-1650 965,-1650 969.84,-1645.16 J0202.A7
USB_D_P: J0202.A6 J0202.B6 U0201.1 | length 765
  Top Layer w7: U0201.1 462,-1372.63 485.23,-1372.63 485.6,-1373 520.33,-1373 559,-1411.67 559,-1479 601,-1521 912.7,-1521 947.31,-1555.62 947.31,-1578.72 947.75,-1579.16 947.75,-1602.51 J0202.A6 952.57,-1602.51 952.57,-1572.43 960,-1565 985,-1565 990,-1570 990,-1604.44 J0202.B6
pads on no net: J0201.1 J0201.3 J0201.4 J0201.5 J0201.6 J0201.8 J0201.9 J0202. J0202.A5 J0202.A8 J0202.B5 J0202.B8 U0101.2 U0101.3 U0101.4 U0201.4 U0201.5 U0201.6 U0202.5

## Polygon pours and split planes (outlines as drawn)
GND on GND "GND_L02_P000" (solid, remove dead copper, pour order 0): 0,-2.5 0,-1902.5 1900,-1902.5 1900,2.5 1600,2.5
3V3 on PWR "3V3_L03_P001" (solid, remove dead copper, pour order 1): 0,0 0,-1900 1900,-1900 1900,0 405,0
EARTH on Top Layer "EARTH_L01_P003" (solid, pour order 3): 0,0 0,-1900 1900,-1900 1900,-5 1430,-5

## Keep-outs
Keep-Out Layer:
  lines w10: 0,-1850 ccw(c50,-1850) 50,-1900 1850,-1900 ccw(c1850,-1850) 1900,-1850 1900,-50 ccw(c1850,-50) 1850,0 255,0 50,0 ccw(c50,-50) 0,-50 0,-1850

## Other copper
Top Layer:
  pour cut-out: 570,-355 150,-775 150,-1565 245,-1660 1655,-1660 1750,-1565 1750,-740 1365,-355

## Text inside footprints (layer, text, board x,y; h text height)
U0101: Top Overlay "*" at 753.71,-1054.89 h30; Mechanical 13 "*" at 855.21,-1069.89 h30